# EAGLE board sht (EAGLE 9.3.0)
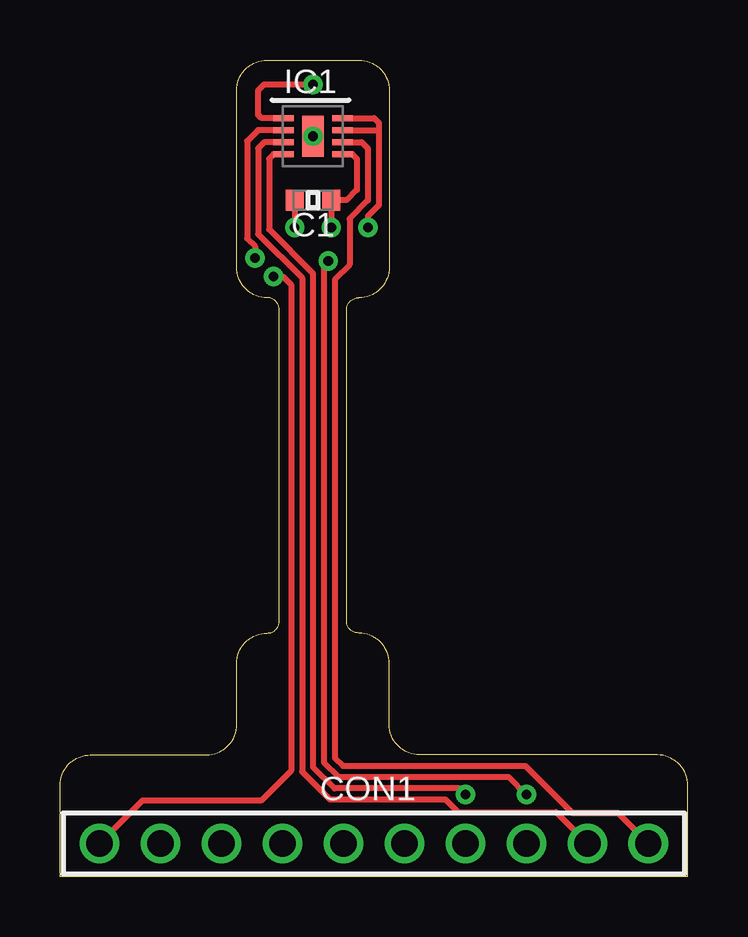
[diagram p0: board, top side]
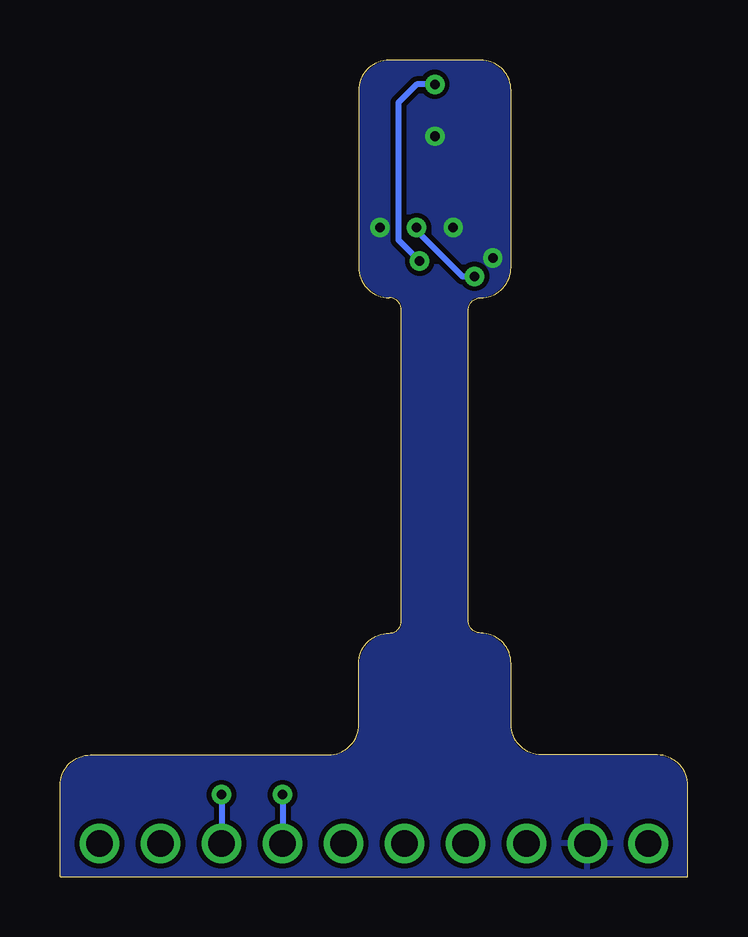
[diagram p1: board, bottom side, seen from below]

Size 26.16 x 34.04 mm. Coordinates in mm from the lower left corner, seen from the top.
Outline: 26.16,0 26.16,3.81 arc90 24.89,5.08 14.99,5.08 arc-90 13.72,6.35 13.72,8.89 arc90 12.45,10.16 arc-90 11.94,10.67 11.94,23.62 arc-90 12.45,24.13 arc90 13.72,25.4 13.72,32.77 arc90 12.45,34.04 8.64,34.04 arc90 7.37,32.77 7.37,25.4 arc90 8.64,24.13 arc-90 9.14,23.62 9.14,10.67 arc-90 8.64,10.16 arc90 7.37,8.89 7.37,6.35 arc-90 6.1,5.08 1.27,5.08 arc90 0,3.81 0,0 26.16,0
Copper layers (1*16): Top 0.035mm / dielectric 1.5mm / Bottom 0.035mm
Design rules "drc": minimum track width 10mil, minimum drill 0.4mm, track to track 8mil, track to pad 10mil, pad to pad 8mil, via to via 8mil, smd to smd 0mil, copper to edge 0mil, drill to drill 6mil, minimum pad ring 10mil, minimum via ring 8mil, stop-mask expansion 4mil, vias tented up to drill 25mil, thermal gap 10mil

## Footprints (pad centres in the part's own frame; a part is rotated, then mirrored left to right if it is on the bottom)
0603 = smd 0.762 x 0.889: 1 -0.762,0; 2 0.762,0
HEADER-10P-DIP-2_54MM = drill 1.1 pad 1.65: 1 -11.43,0; 2 -8.89,0; 3 -6.35,0; 4 -3.81,0; 5 -1.27,0; 6 1.27,0; 7 3.81,0; 8 6.35,0; 9 8.89,0; 10 11.43,0
SHT3X-DIS = smd 0.85 x 0.254: 1 -1.225,0.75; 2 -1.225,0.25; 3 -1.225,-0.25; 4 -1.225,-0.75; 5 1.225,-0.75; 6 1.225,-0.25; 7 1.225,0.25; 8 1.225,0.75 | smd 0.9 x 1.7: 9 0,0

## Placement (x,y rotation side)
C1  [0603]  10.54,28.19 0 top
CON1  [HEADER-10P-DIP-2_54MM]  13.08,1.4 0 top
IC1  [SHT3X-DIS]  10.54,30.86 0 top

## Library data of the parts
C1 CON1 IC1 = SamacSys_Parts

## Nets
GND: C1.1 CON1.2 IC1.2 IC1.7 IC1.8 IC1.9
N$1: CON1.10 IC1.6
N$2: CON1.8 IC1.1
N$3: CON1.7 IC1.4
N$5: CON1.9 IC1.3
VCC: C1.2 CON1.1 IC1.5

## Tracks (layer width: path | path; a pad name or v marks a point on that pad's centre or on a via)
GND  (via drill 0.4)
  Top 0.254: IC1.2 8.25,31.11 7.8,30.66 7.8,26.6 8.13,26.27 v8.13,25.78 | C1.1 v9.78,27.05 | IC1.8 13.09,31.61 13.28,31.42 13.28,31.11 | v12.83,27.05 12.83,27.54 13.28,27.99 13.28,31.11 | IC1.7 13.28,31.11
  other vias: 10.54,30.86
  pour Bottom: 0.13,0.13 0.13,3.68 arc-90 1.4,4.95 6.22,4.95 arc90 7.49,6.22 7.49,8.76 arc-90 8.76,10.03 arc90 9.27,10.54 9.27,23.75 arc90 8.76,24.26 arc-90 7.49,25.53 7.49,32.64 arc-90 8.76,33.91 12.32,33.91 arc-90 13.59,32.64 13.59,25.53 arc-90 12.32,24.26 arc90 11.81,23.75 11.81,10.54 arc90 12.32,10.03 arc-90 13.59,8.76 13.59,6.22 arc90 14.86,4.95 24.77,4.95 arc-90 26.04,3.68 26.04,0.13
N$1
  Top 0.254: IC1.6 12.57,30.61 12.83,30.35 12.83,28.18 12.06,27.42 12.06,25.51 11.46,24.9 11.46,4.95 11.79,4.62 19.39,4.62 21.35,2.67 23.24,2.67 CON1.10
N$2  (via drill 0.4)
  Top 0.254: v11.18,25.65 11,25.48 11,4.76 11.6,4.16 18.7,4.16 v19.43,3.43 | IC1.1 8.39,31.61 8.26,31.75 8.26,32.77 8.51,33.02 v10.54,33.02
  Bottom 0.254: v10.54,33.02 11.3,33.02 12.06,32.26 12.06,26.54 v11.18,25.65 | v19.43,3.43 CON1.8
N$3  (via drill 0.4)
  Top 0.254: IC1.4 8.9,30.11 8.71,29.92 8.71,26.98 10.54,25.15 10.54,4.57 11.43,3.68 16.64,3.68 v16.89,3.43
  Bottom 0.254: v16.89,3.43 CON1.7
N$5
  Top 0.254: IC1.3 8.51,30.61 8.26,30.35 8.26,26.79 10.08,24.96 10.08,4.38 11.24,3.23 16.06,3.23 16.59,2.7 20.67,2.7 CON1.9
VCC  (via drill 0.4)
  Top 0.254: v11.3,27.05 C1.2 11.94,28.19 12.37,28.63 12.37,29.92 12.18,30.11 IC1.5 | v8.89,25.02 9.27,25.02 9.63,24.66 9.63,4.42 8.38,3.17 3.43,3.17 CON1.1
  Bottom 0.254: v11.3,27.05 11.3,26.92 9.4,25.02 v8.89,25.02